# Altium PCB ARDUINO MEGA2560 EXPANSION BOARD_prueba.PcbDoc
Units mm, origin at the board's own origin, x right, y up, seen from the top; angles counter-clockwise.
Board outline 132.72 x 90.17 mm, 2 copper layers (Top Layer, Bottom Layer); 29 components, 58 nets, 654 pads, 0 vias.
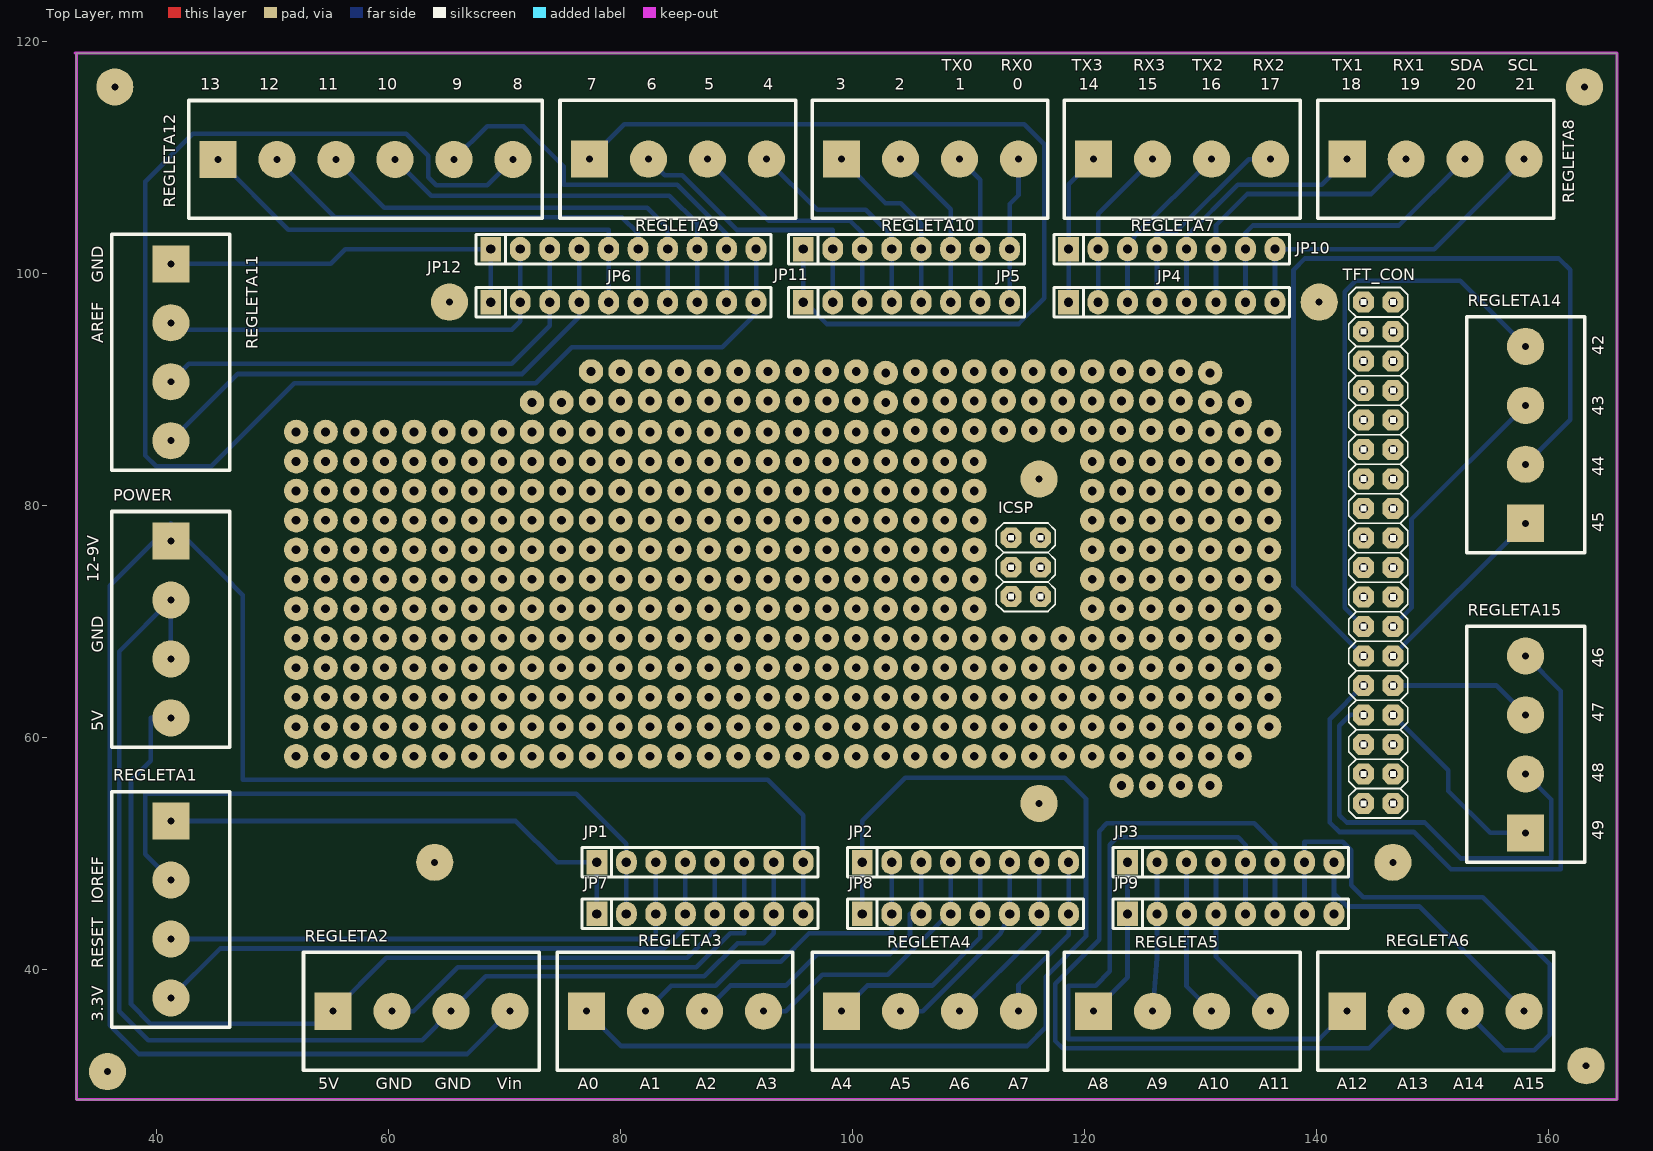
[diagram p0: Top Layer view]
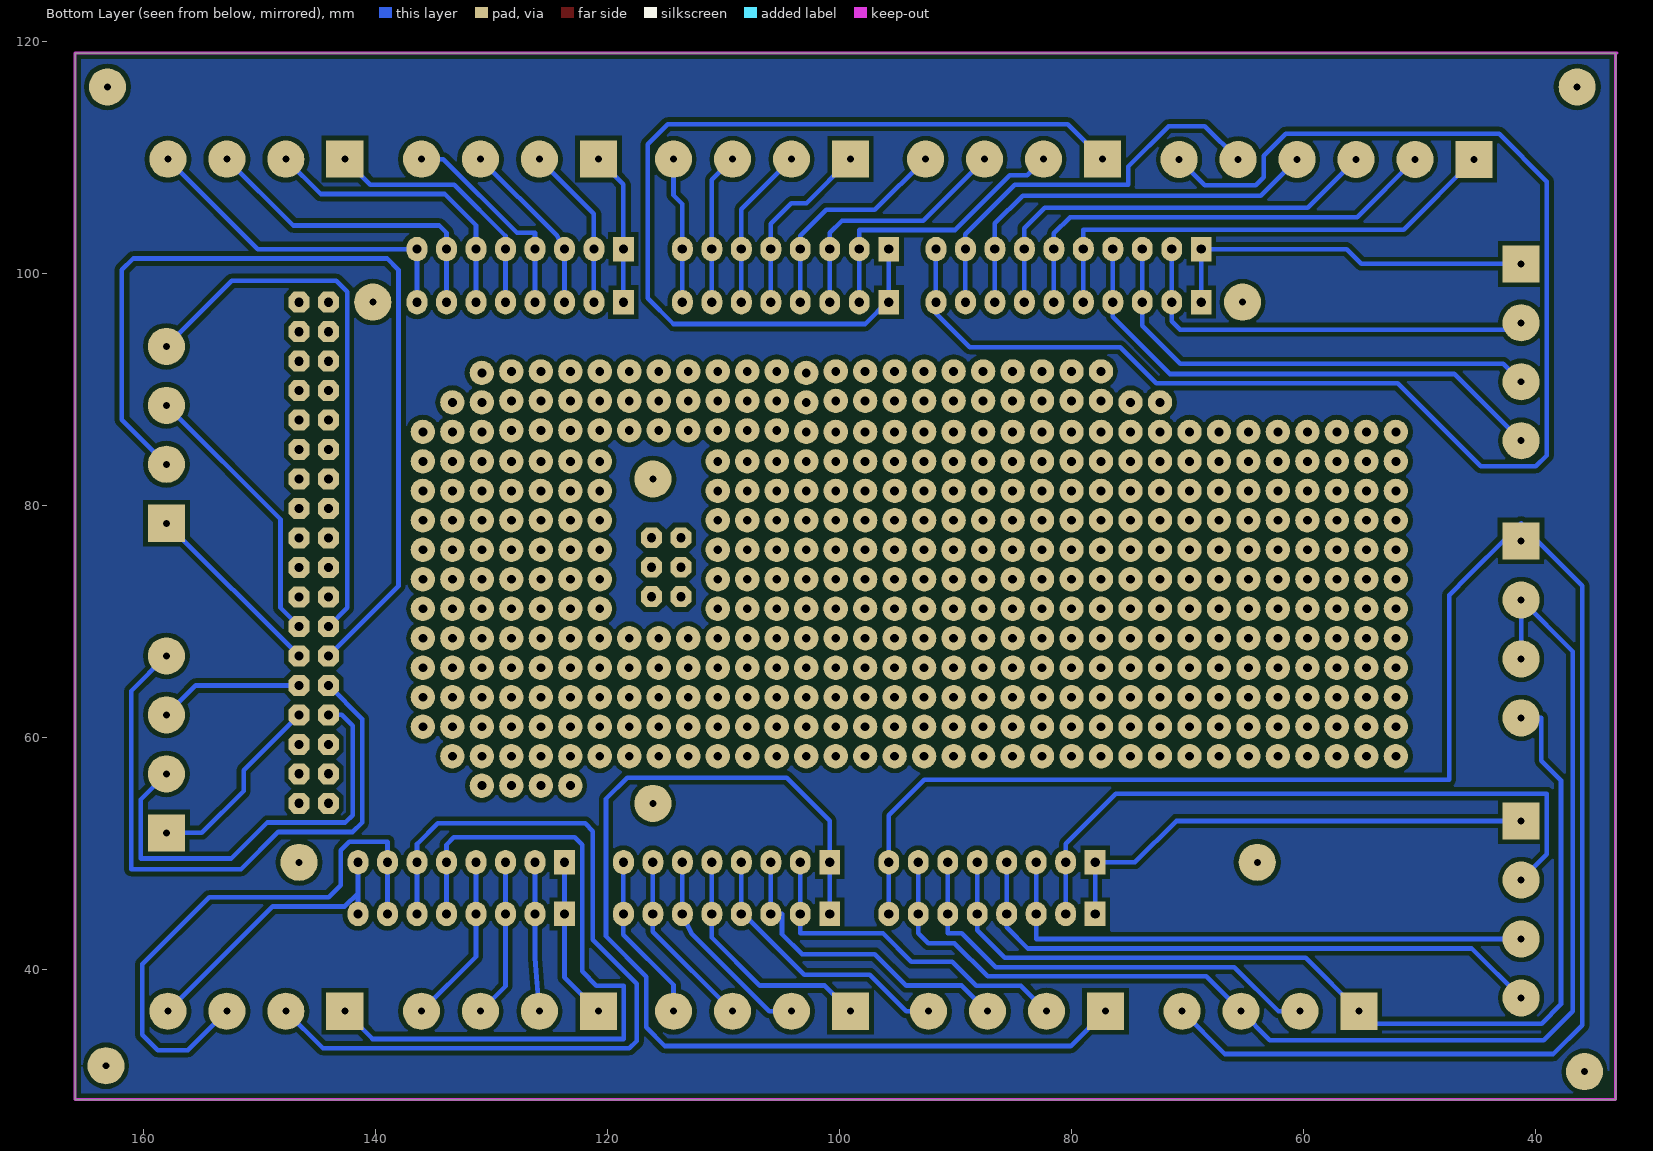
[diagram p1: Bottom Layer view, seen from below]

## Layer stack, top to bottom
Top Solder: solder mask 0.0102, Solder Resist, Dk 3.5
Top Layer: signal copper 0.0356
Dielectric 1: dielectric 0.32, FR-4, Dk 4.8
Bottom Layer: signal copper 0.0356
Bottom Solder: solder mask 0.0102, Solder Resist, Dk 3.5

## Board outline
33.147,118.999 33.147,28.829 162.306,28.829 165.862,28.829 165.862,118.999

## Design rules (kind name [scope] priority, off if disabled: settings)
Clearance [All] p1: gap=0.4
PolygonConnect [All] p1: connectstyle=Relief reliefconductorwidth=0.254 reliefentries=4 polygonreliefangle="90 Angle" airgapwidth=0.254
RoutingLayers [All] p1: top layer_v5=FALSE bottom layer_v5=TRUE
RoutingTopology [All] p1: topology=Daisy_Balanced
RoutingVias [All] p1: holewidth=0.711 width=1.5 viastyle="Through Hole" minholewidth=0.711 minwidth=1.5 maxholewidth=0.711 maxwidth=1.5
SolderMaskExpansion [All] p1: expansion=0.102
Width [All] p1: maxlimit=0.8 minlimit=0.254 preferedwidth=0.4
28 further rules are at their usual default settings.

## Components (designator, comment, footprint, x,y, rotation, side; value= is the part's Value field where it differs from the comment)
ICSP "SIP_2X3" SIP_2X03 113.665,77.216 r270 top
JP1 "SIP_8" SIP_8 77.978,49.276 r0 top
JP2 "SIP_8" SIP_8 100.838,49.276 r0 top
JP3 "SIP_8" SIP_8 123.698,49.276 r0 top
JP4 "SIP_8" SIP_8 118.618,97.536 r0 top
JP5 "SIP_8" SIP_8 95.758,97.536 r0 top
JP6 "SIP_10" SIP_10 68.834,97.536 r0 top
JP7 "SIP_8" SIP_8 77.978,44.831 r0 top
JP8 "SIP_8" SIP_8 100.838,44.831 r0 top
JP9 "SIP_8" SIP_8 123.698,44.831 r0 top
JP10 "SIP_8" SIP_8 118.618,102.108 r0 top
JP11 "SIP_8" SIP_8 95.758,102.108 r0 top
JP12 "SIP_10" SIP_10 68.834,102.108 r0 top
POWER "REGLETA_4" REGLETA_4 41.275,76.962 r270 top
REGLETA1 "REGLETA_4" REGLETA_4 41.275,52.832 r270 top
REGLETA2 "REGLETA_4" REGLETA_4 55.245,36.449 r0 top
REGLETA3 "REGLETA_4" REGLETA_4 77.089,36.449 r0 top
REGLETA4 "REGLETA_4" REGLETA_4 99.06,36.449 r0 top
REGLETA5 "REGLETA_4" REGLETA_4 120.777,36.449 r0 top
REGLETA6 "REGLETA_4" REGLETA_4 142.621,36.449 r0 top
REGLETA7 "REGLETA_4" REGLETA_4 120.777,109.855 r0 top
REGLETA8 "REGLETA_4" REGLETA_4 142.621,109.855 r0 top
REGLETA9 "REGLETA_4" REGLETA_4 77.343,109.855 r0 top
REGLETA10 "REGLETA_4" REGLETA_4 99.06,109.855 r0 top
REGLETA11 "REGLETA_4" REGLETA_4 41.275,100.838 r270 top
REGLETA12 "REGLETA_6" REGLETA_6 45.339,109.855 r0 top
REGLETA14 "REGLETA_4" REGLETA_4 157.988,78.486 r90 top
REGLETA15 "REGLETA_4" REGLETA_4 157.988,51.816 r90 top
TFT_CON "SIP_2X18" SIP_2X18 144.018,97.536 r270 top

## Footprints (in the part's own frame and the unit in brackets; to place one, negate y for a bottom-side part, rotate by r counter-clockwise, add the part's x,y. Pads: shape width x height; smd on the part's side, far side on the other; paste and mask are expansions set on the pad)
REGLETA_4 [mm]
  rect 3.2x3.2 hole 0.6: 1(0,0)
  round 3.2 hole 0.6: 2(5.08,0) 3(10.16,0) 4(15.24,0)
  silkscreen extent -2.54,-5.08 17.78,5.08
REGLETA_6 [mm]
  rect 3.2x3.2 hole 0.6: 1(0,-0.025)
  round 3.2 hole 0.6: 2(5.08,-0.025) 3(10.16,-0.025) 4(15.24,-0.025) 5(20.32,-0.025) 6(25.4,-0.025)
  silkscreen extent -2.54,-5.1 27.94,5.06
SIP_2X03 [mm]
  oct 1.8x1.8 hole 0.8: 1(-0.025,0) 2(-0.025,2.54) 3(2.515,0) 4(2.515,2.54) 5(5.055,0) 6(5.055,2.54)
  silkscreen extent -1.29,-1.27 6.33,3.81
SIP_2X18 [mm]
  oct 1.8x1.8 hole 0.8: 1(0,0) 2(0,2.54) 3(2.54,0) 4(2.54,2.54) 5(5.08,0) 6(5.08,2.54) 7(7.62,0) 8(7.62,2.54) 9(10.16,0) 10(10.16,2.54) 11(12.7,0) 12(12.7,2.54) 13(15.24,0) 14(15.24,2.54) 15(17.78,0) 16(17.78,2.54) 17(20.32,0) 18(20.32,2.54) 19(22.86,0) 20(22.86,2.54) 21(25.4,0) 22(25.4,2.54) 23(27.94,0) 24(27.94,2.54) 25(30.48,0) 26(30.48,2.54) 27(33.02,0) 28(33.02,2.54) 29(35.56,0) 30(35.56,2.54) 31(38.1,0) 32(38.1,2.54) 33(40.64,0) 34(40.64,2.54) 35(43.18,0) 36(43.18,2.54)
  silkscreen extent -1.27,-1.27 44.45,3.81
SIP_8 [mm]
  rect 1.8x2.1 hole 0.8: 1(0,0)
  oval 1.8x2.1 hole 0.8: 2(2.54,0) 3(5.08,0) 4(7.62,0) 5(10.16,0) 6(12.7,0) 7(15.24,0) 8(17.78,0)
  silkscreen extent -1.27,-1.27 19.05,1.27
SIP_10 [mm]
  rect 1.8x2.1 hole 0.8: 1(0,0)
  oval 1.8x2.1 hole 0.8: 2(2.54,0) 3(5.08,0) 4(7.62,0) 5(10.16,0) 6(12.7,0) 7(15.24,0) 8(17.78,0) 9(20.32,0) 10(22.86,0)
  silkscreen extent -1.27,-1.27 24.13,1.27

## Free pads (board coordinates)
  round 3.2 hole 0.6: 1(35.814,31.242) 1(36.449,116.078) 1(64.008,49.276) 1(65.278,97.536) 1(116.078,54.356) 1(116.078,82.296) 1(140.208,97.536) 1(146.558,49.276) 1(163.068,116.078) 1(163.195,31.75)
  round 2.1 hole 0.762: 1(77.47,58.42) 1(77.47,86.36) 1(77.47,89.027) 1(77.47,91.567) 1(80.01,58.42) 1(80.01,63.5) 1(80.01,68.58) 1(80.01,73.66) 1(80.01,78.74) 1(80.01,83.82) 1(80.01,86.36) 1(105.41,58.42) 1(105.41,63.5) 1(105.41,68.58) 1(105.41,89.027) 1(105.41,91.567) 1(123.19,55.88) 1(130.81,55.88) 2(52.07,63.5) 2(52.07,68.58) 2(52.07,73.66) 2(52.07,78.74) 2(54.61,63.5) 2(54.61,68.58) 2(54.61,73.66) 2(54.61,78.74) 2(77.47,83.82) 2(80.01,89.027) 2(80.01,91.567) 2(82.55,58.42) 2(82.55,63.5) 2(82.55,68.58) 2(82.55,73.66) 2(82.55,78.74) 2(82.55,83.82) 2(82.55,86.36) 2(107.95,58.42) 2(107.95,63.5) 2(107.95,68.58) 2(107.95,89.027) 2(107.95,91.567) 2(125.73,55.88) 2(133.35,88.9) 3(52.07,58.42) 3(52.07,83.82) 3(54.61,58.42) 3(54.61,83.82) 3(57.15,58.42) 3(57.15,63.5) 3(57.15,68.58) 3(57.15,73.66) 3(57.15,78.74) 3(57.15,83.82) 3(62.23,86.36) 3(77.47,81.28) 3(82.55,89.027) 3(82.55,91.567) 3(85.09,58.42) 3(85.09,63.5) 3(85.09,68.58) 3(85.09,73.66) 3(85.09,78.74) 3(85.09,83.82) 3(85.09,86.36) 3(110.49,58.42) 3(110.49,63.5) 3(110.49,68.58) 3(110.49,89.027) 3(110.49,91.567) 3(128.27,55.88) 3(133.35,86.36) 3(135.89,86.36) 4(59.69,58.42) 4(59.69,63.5) 4(59.69,68.58) 4(59.69,73.66) 4(59.69,78.74) 4(59.69,83.82) 4(59.69,86.36) 4(77.47,78.74) 4(85.09,89.027) 4(85.09,91.567) 4(87.63,58.42) 4(87.63,63.5) 4(87.63,68.58) 4(87.63,73.66) 4(87.63,78.74) 4(87.63,83.82) 4(87.63,86.36) 4(107.95,83.82) 4(110.49,83.82) 4(113.03,58.42) 4(113.03,63.5) 4(113.03,68.58) 4(113.03,89.027) 4(113.03,91.567) 4(125.73,83.82) 4(128.27,83.82) 4(133.35,83.82) 4(135.89,83.82) 5(57.15,86.36) 5(62.23,58.42) 5(62.23,63.5) 5(62.23,68.58) 5(62.23,73.66) 5(62.23,78.74) 5(62.23,83.82) 5(77.47,76.2) 5(87.63,89.027) 5(87.63,91.567) 5(90.17,58.42) 5(90.17,63.5) 5(90.17,68.58) 5(90.17,73.66) 5(90.17,78.74) 5(90.17,83.82) 5(90.17,86.36) 5(107.95,81.28) 5(110.49,81.28) 5(115.57,58.42) 5(115.57,63.5) 5(115.57,68.58) 5(115.57,89.027) 5(115.57,91.567) 5(125.73,81.28) 5(128.27,81.28) 5(133.35,81.28) 5(135.89,81.28) 6(52.07,86.36) 6(54.61,86.36) 6(64.77,58.42) 6(64.77,63.5) 6(64.77,68.58) 6(64.77,73.66) 6(64.77,78.74) 6(64.77,83.82) 6(64.77,86.36) 6(77.47,73.66) 6(90.17,89.027) 6(90.17,91.567) 6(92.71,58.42) 6(92.71,63.5) 6(92.71,68.58) 6(92.71,73.66) 6(92.71,78.74) 6(92.71,83.82) 6(92.71,86.36) 6(107.95,78.74) 6(110.49,78.74) 6(118.11,58.42) 6(118.11,63.5) 6(118.11,68.58) 6(118.11,89.027) 6(118.11,91.567) 6(125.73,78.74) 6(128.27,78.74) 6(133.35,78.74) 6(135.89,78.74) 7(67.31,58.42) 7(67.31,63.5) 7(67.31,68.58) 7(67.31,73.66) 7(67.31,78.74) 7(67.31,83.82) 7(67.31,86.36) 7(77.47,71.12) 7(92.71,89.027) 7(92.71,91.567) 7(95.25,58.42) 7(95.25,63.5) 7(95.25,68.58) 7(95.25,73.66) 7(95.25,78.74) 7(95.25,83.82) 7(95.25,86.36) 7(107.95,76.2) 7(110.49,76.2) 7(120.65,58.42) 7(120.65,63.5) 7(120.65,68.58) 7(120.65,89.027) 7(120.65,91.567) 7(125.73,76.2) 7(128.27,76.2) 7(133.35,76.2) 7(135.89,76.2) 8(69.85,58.42) 8(69.85,63.5) 8(69.85,68.58) 8(69.85,73.66) 8(69.85,78.74) 8(69.85,83.82) 8(69.85,86.36) 8(77.47,68.58) 8(95.25,89.027) 8(95.25,91.567) 8(97.79,58.42) 8(97.79,63.5) 8(97.79,68.58) 8(97.79,73.66) 8(97.79,78.74) 8(97.79,83.82) 8(97.79,86.36) 8(107.95,73.66) 8(110.49,73.66) 8(123.19,58.42) 8(123.19,63.5) 8(123.19,68.58) 8(123.19,89.027) 8(123.19,91.567) 8(125.73,73.66) 8(128.27,73.66) 8(130.81,58.42) 8(130.81,63.5) 8(133.35,73.66) 8(135.89,73.66) 9(72.39,58.42) 9(72.39,63.5) 9(72.39,68.58) 9(72.39,73.66) 9(72.39,78.74) 9(72.39,83.82) 9(72.39,86.36) 9(72.39,88.9) 9(77.47,66.04) 9(97.79,89.027) 9(97.79,91.567) 9(100.33,58.42) 9(100.33,63.5) 9(100.33,68.58) 9(100.33,73.66) 9(100.33,78.74) 9(100.33,83.82) 9(100.33,86.36) 9(107.95,71.12) 9(110.49,71.12) 9(125.73,58.42) 9(125.73,63.5) 9(125.73,68.58) 9(125.73,71.12) 9(125.73,89.027) 9(125.73,91.567) 9(128.27,71.12) 9(133.35,58.42) 9(133.35,63.5) 9(133.35,71.12) 9(135.89,71.12) 10(74.93,58.42) 10(74.93,63.5) 10(74.93,68.58) 10(74.93,73.66) 10(74.93,78.74) 10(74.93,83.82) 10(74.93,86.36) 10(74.93,88.9) 10(77.47,63.5) 10(100.33,89.027) 10(100.33,91.567) 10(102.87,58.42) 10(102.87,63.5) 10(102.87,68.58) 10(102.87,73.66) 10(102.87,78.74) 10(102.87,83.82) 10(102.87,86.36) 10(128.27,58.42) 10(128.27,63.5) 10(128.27,68.58) 10(128.27,89.027) 10(128.27,91.567) 10(133.35,68.58) 10(135.89,63.5) 10(135.89,68.58) 11(74.93,60.96) 11(74.93,66.04) 11(74.93,71.12) 11(74.93,76.2) 11(74.93,81.28) 11(102.87,60.96) 11(102.87,66.04) 11(102.87,71.12) 11(102.87,76.2) 11(102.87,81.28) 11(128.27,60.96) 11(128.27,66.04) 11(128.27,86.487) 11(130.81,68.58) 11(135.89,60.96) 11(135.89,66.04) 12(72.39,60.96) 12(72.39,66.04) 12(72.39,71.12) 12(72.39,76.2) 12(72.39,81.28) 12(100.33,60.96) 12(100.33,66.04) 12(100.33,71.12) 12(100.33,76.2) 12(100.33,81.28) 12(105.41,71.12) 12(120.65,71.12) 12(123.19,71.12) 12(125.73,60.96) 12(125.73,66.04) 12(125.73,86.487) 12(130.81,71.12) 12(133.35,60.96) 12(133.35,66.04) 13(69.85,60.96) 13(69.85,66.04) 13(69.85,71.12) 13(69.85,76.2) 13(69.85,81.28) 13(97.79,60.96) 13(97.79,66.04) 13(97.79,71.12) 13(97.79,76.2) 13(97.79,81.28) 13(105.41,73.66) 13(120.65,73.66) 13(123.19,60.96) 13(123.19,66.04) 13(123.19,73.66) 13(123.19,86.487) 13(130.81,60.96) 13(130.81,66.04) 13(130.81,73.66) 14(67.31,60.96) 14(67.31,66.04) 14(67.31,71.12) 14(67.31,76.2) 14(67.31,81.28) 14(95.25,60.96) 14(95.25,66.04) 14(95.25,71.12) 14(95.25,76.2) 14(95.25,81.28) 14(105.41,76.2) 14(120.65,60.96) 14(120.65,66.04) 14(120.65,76.2) 14(120.65,86.487) 14(123.19,76.2) 14(130.81,76.2) 15(64.77,60.96) 15(64.77,66.04) 15(64.77,71.12) 15(64.77,76.2) 15(64.77,81.28) 15(92.71,60.96) 15(92.71,66.04) 15(92.71,71.12) 15(92.71,76.2) 15(92.71,81.28) 15(105.41,78.74) 15(118.11,60.96) 15(118.11,66.04) 15(118.11,86.487) 15(120.65,78.74) 15(123.19,78.74) 15(130.81,78.74) 16(62.23,60.96) 16(62.23,66.04) 16(62.23,71.12) 16(62.23,76.2) 16(62.23,81.28) 16(90.17,60.96) 16(90.17,66.04) 16(90.17,71.12) 16(90.17,76.2) 16(90.17,81.28) 16(105.41,81.28) 16(115.57,60.96) 16(115.57,66.04) 16(115.57,86.487) 16(120.65,81.28) 16(123.19,81.28) 16(130.81,81.28) 17(59.69,60.96) 17(59.69,66.04) 17(59.69,71.12) 17(59.69,76.2) 17(59.69,81.28) 17(87.63,60.96) 17(87.63,66.04) 17(87.63,71.12) 17(87.63,76.2) 17(87.63,81.28) 17(105.41,83.82) 17(113.03,60.96) 17(113.03,66.04) 17(113.03,86.487) 17(120.65,83.82) 17(123.19,83.82) 17(130.81,83.82) 18(57.15,60.96) 18(57.15,66.04) 18(57.15,71.12) 18(57.15,76.2) 18(57.15,81.28) 18(85.09,60.96) 18(85.09,66.04) 18(85.09,71.12) 18(85.09,76.2) 18(85.09,81.28) 18(110.49,60.96) 18(110.49,66.04) 18(110.49,86.487) 18(130.81,86.36) 19(52.07,60.96) 19(52.07,66.04) 19(52.07,71.12) 19(52.07,76.2) 19(52.07,81.28) 19(54.61,60.96) 19(54.61,66.04) 19(54.61,71.12) 19(54.61,76.2) 19(54.61,81.28) 19(82.55,60.96) 19(82.55,66.04) 19(82.55,71.12) 19(82.55,76.2) 19(82.55,81.28) 19(102.87,88.9) 19(107.95,60.96) 19(107.95,66.04) 19(107.95,86.487) 19(130.81,88.9) 20(77.47,60.96) 20(80.01,60.96) 20(80.01,66.04) 20(80.01,71.12) 20(80.01,76.2) 20(80.01,81.28) 20(102.87,91.44) 20(105.41,60.96) 20(105.41,66.04) 20(105.41,86.487) 20(130.81,91.44)

## Nets (pads, with @x,y where several pads share a name; then routed paths per layer and width w, separated by ;. In a path a pad name is that pad's centre, name@x,y a point inside that pad or via, vN(x,y) a via of type N, cw(c..) or ccw(c..) an arc to the next point about the centre after c; other vN are vias at no path point)
NetJP1_1: JP1.1 JP7.1 REGLETA1.1 | length 42.6
  Bottom Layer w0.4: REGLETA1.1 70.993,52.832 74.549,49.276 JP1.1 JP7.1
NetJP1_2: JP1.2 JP7.2 REGLETA1.2 | length 57.6
  Bottom Layer w0.4: REGLETA1.2 39.065,49.962 39.065,55.194 76.2,55.194 80.518,50.876 JP1.2 JP7.2
NetJP1_3: JP1.3 JP7.3 REGLETA1.3 | length 48.4
  Bottom Layer w0.4: REGLETA1.3 83.058,42.672 JP7.3 JP1.3
NetJP1_4: JP1.4 JP7.4 REGLETA1.4 | length 52.4
  Bottom Layer w0.4: REGLETA1.4 45.532,41.849 83.766,41.849 85.598,43.681 JP7.4 JP1.4
NetJP1_5: JP1.5 JP7.5 POWER.4 REGLETA2.1 | length 87.3
  Bottom Layer w0.4: POWER.4 39.548,61.722 39.548,58.039 37.846,56.337 37.846,37.035 39.499,35.382 54.178,35.382 REGLETA2.1 59.845,41.049 85.754,41.049 88.138,43.433 JP7.5 JP1.5
NetJP1_6: JP1.6 JP7.6 REGLETA2.2 | length 39.2
  Bottom Layer w0.4: REGLETA2.2 62.179,36.449 65.979,40.249 86.554,40.249 89.485,43.18 90.678,43.18 JP7.6 JP1.6
NetJP1_7: JP1.7 JP7.7 POWER.2 POWER.3 REGLETA2.3 | length 109.7
  Bottom Layer w0.4: POWER.3 POWER.2 36.83,67.437 36.83,36.452 39.322,33.96 62.916,33.96 REGLETA2.3 68.405,39.449 87.232,39.449 90.099,42.316 92.354,42.316 93.218,43.18 JP7.7 JP1.7
NetJP1_8: JP1.8 JP7.8 POWER.1 REGLETA2.4 | length 167.5
  Bottom Layer w0.4: POWER.1@40.945,76.632 40.246,77.33 36.017,73.101 36.017,35.255 38.506,32.766 66.802,32.766 REGLETA2.4 ; JP7.8 JP1.8 95.758,53.34 92.71,56.388 47.473,56.388 47.473,72.301 45.783,73.99 POWER.1@42.558,77.216 ; POWER.1@42.558,77.216 41.275,78.499 POWER.1 41.529,77.216 POWER.1@42.558,77.216
NetJP2_1: JP2.1 JP8.1 REGLETA3.1 | length 92.2
  Bottom Layer w0.4: REGLETA3.1 80.089,33.449 115.034,33.449 116.656,35.071 116.656,39.43 120.118,42.892 120.118,54.736 118.288,56.566 104.546,56.566 100.838,52.857 JP2.1 100.838,47.041 JP8.1
NetJP2_2: JP2.2 JP8.2 REGLETA3.2 | length 30.1
  Bottom Layer w0.4: REGLETA3.2 84.369,38.649 88.23,38.649 90.302,40.721 93.82,40.721 96.254,43.155 103.378,43.155 JP8.2 JP2.2
NetJP2_3: JP2.3 JP8.3 REGLETA3.3 | length 27.6
  Bottom Layer w0.4: REGLETA3.3 89.459,38.659 94.259,38.659 96.952,41.351 103.226,41.351 104.953,43.078 104.953,44.831 JP8.3 JP2.3
NetJP2_4: JP2.4 JP8.4 REGLETA3.4 | length 24
  Bottom Layer w0.4: REGLETA3.4 94.234,36.449 97.387,39.602 103.051,39.602 108.28,44.831 JP8.4 JP2.4
NetJP2_5: JP2.5 JP8.5 REGLETA4.1 | length 21
  Bottom Layer w0.4: REGLETA4.1 101.27,38.659 106.858,38.659 110.998,42.799 JP8.5 JP2.5
NetJP2_6: JP2.6 JP8.6 REGLETA4.2 | length 17.7
  Bottom Layer w0.4: REGLETA4.2 106.045,36.449 112.776,43.18 JP8.6 JP2.6
NetJP2_7: JP2.7 JP8.7 REGLETA4.3 | length 15.7
  Bottom Layer w0.4: REGLETA4.3 116.078,43.307 JP8.7 JP2.7
NetJP2_8: JP2.8 JP8.8 REGLETA4.4 | length 14.6
  Bottom Layer w0.4: REGLETA4.4 114.3,38.735 118.618,43.053 JP8.8 JP2.8
NetJP3_1: JP3.1 JP9.1 REGLETA5.1 | length 14
  Bottom Layer w0.4: REGLETA5.1 123.698,39.37 JP9.1 JP3.1
NetJP3_2: JP3.2 JP9.2 REGLETA5.2 | length 12.8
  Bottom Layer w0.4: REGLETA5.2 126.238,41.021 JP9.2 JP3.2
NetJP3_3: JP3.3 JP9.3 REGLETA5.3 | length 13.7
  Bottom Layer w0.4: JP3.3 128.778,47.041 JP9.3 128.778,38.608 REGLETA5.3
NetJP3_4: JP3.4 JP9.4 REGLETA5.4 | length 14.8
  Bottom Layer w0.4: JP3.4 131.318,47.041 JP9.4 131.318,41.148 REGLETA5.4
NetJP3_5: JP3.5 JP9.5 REGLETA6.1 | length 62.8
  Bottom Layer w0.4: JP9.5 JP3.5 133.858,50.8 133.223,51.435 122.809,51.435 122.174,50.8 122.174,39.878 120.946,38.649 118.577,38.649 118.577,34.061 140.233,34.061 REGLETA6.1
NetJP3_6: JP3.6 JP9.6 REGLETA6.2 | length 73.6
  Bottom Layer w0.4: JP9.6 JP3.6 136.398,50.851 134.62,52.629 121.92,52.629 121.26,51.968 121.26,42.599 117.475,38.814 117.475,33.884 118.11,33.249 144.501,33.249 REGLETA6.2
NetJP3_7: JP3.7 JP9.7 REGLETA6.3 | length 48.8
  Bottom Layer w0.4: JP9.7 JP3.7 138.938,51.054 142.24,51.054 142.978,50.316 142.978,47.293 143.996,46.276 154.308,46.276 160.071,40.513 160.071,34.417 158.75,33.096 156.134,33.096 REGLETA6.3
NetJP3_8: JP3.8 JP9.8 REGLETA6.4 | length 25
  Bottom Layer w0.4: JP9.8 141.478,46.622 ; JP3.8 141.478,47.041 141.478,46.622 ; REGLETA6.4 148.834,45.476 142.624,45.476 141.478,46.622
NetJP4_1: JP4.1 JP10.1 REGLETA7.1 | length 13.2
  Bottom Layer w0.4: JP4.1 JP10.1 118.618,107.696 REGLETA7.1
NetJP4_2: JP4.2 JP10.2 REGLETA7.2 | length 14.3
  Bottom Layer w0.4: JP4.2 JP10.2 121.158,105.156 REGLETA7.2
NetJP4_3: JP4.3 JP10.3 REGLETA7.3 | length 15.2
  Bottom Layer w0.4: JP4.3 JP10.3 124.333,103.251 REGLETA7.3
NetJP4_4: JP4.4 JP10.4 REGLETA7.4 | length 18.4
  Bottom Layer w0.4: JP4.4 JP10.4 126.238,103.505 127.787,103.505 134.137,109.855 REGLETA7.4
NetJP4_5: JP4.5 JP10.5 REGLETA8.1 | length 22.3
  Bottom Layer w0.4: JP4.5 JP10.5 128.778,103.235 133.198,107.655 140.421,107.655 REGLETA8.1
NetJP4_6: JP4.6 JP10.6 REGLETA8.2 | length 25.4
  Bottom Layer w0.4: JP4.6 JP10.6 131.318,104.166 134.007,106.855 144.701,106.855 REGLETA8.2
NetJP4_7: JP4.7 JP10.7 REGLETA8.3 | length 27.5
  Bottom Layer w0.4: JP4.7 JP10.7 133.858,103.505 134.493,104.14 147.066,104.14 REGLETA8.3
NetJP4_8: JP4.8 JP10.8 REGLETA8.4 | length 29.2
  Bottom Layer w0.4: JP4.8 JP10.8 150.114,102.108 REGLETA8.4
NetJP5_1: JP5.1 JP11.1 REGLETA9.1 | length 81.5
  Bottom Layer w0.4: REGLETA9.1 80.343,112.855 114.78,112.855 116.51,111.125 116.51,97.866 114.3,95.656 97.79,95.656 JP5.1@95.758,97.688 ; JP5.1 JP5.1@95.758,97.688 ; JP11.1 95.758,99.822 JP5.1@95.758,97.688
NetJP5_2: JP5.2 JP11.2 REGLETA9.2 | length 24.6
  Bottom Layer w0.4: REGLETA9.2 83.82,108.458 85.319,108.458 90.019,103.758 98.298,103.758 JP11.2 JP5.2
NetJP5_3: JP5.3 JP11.3 REGLETA9.3 | length 21.9
  Bottom Layer w0.4: REGLETA9.3 92.8,104.558 99.785,104.558 100.838,103.505 JP11.3 JP5.3
NetJP5_4: JP5.4 JP11.4 REGLETA9.4 | length 19.2
  Bottom Layer w0.4: REGLETA9.4 96.955,105.483 101.149,105.483 103.378,103.254 JP11.4 JP5.4
NetJP5_5: JP5.5 JP11.5 REGLETA10.1 | length 15.9
  Bottom Layer w0.4: REGLETA10.1 102.845,106.07 104.14,106.07 105.918,104.292 JP11.5 JP5.5
NetJP5_6: JP5.6 JP11.6 REGLETA10.2 | length 14.1
  Bottom Layer w0.4: REGLETA10.2 108.458,105.537 JP11.6 JP5.6
NetJP5_7: JP5.7 JP11.7 REGLETA10.3 | length 13.1
  Bottom Layer w0.4: REGLETA10.3 110.998,108.077 JP11.7 JP5.7
NetJP5_8: JP5.8 JP11.8 REGLETA10.4 | length 12.6
  Bottom Layer w0.4: JP5.8 JP11.8 113.538,105.994 114.3,106.756 REGLETA10.4
NetJP6_1: JP6.1 JP12.1 REGLETA11.1 | length 32.7
  Bottom Layer w0.4: REGLETA11.1 55.042,100.838 56.312,102.108 JP12.1 JP6.1
NetJP6_2: JP6.2 JP12.2 REGLETA11.2 | length 37.2
  Bottom Layer w0.4: REGLETA11.2 41.275,95.174 70.663,95.174 71.374,95.885 JP6.2 JP12.2
NetJP6_3: JP6.3 JP12.3 REGLETA11.3 | length 41.2
  Bottom Layer w0.4: REGLETA11.3 42.827,92.23 70.64,92.23 73.914,95.504 JP6.3 JP12.3
NetJP6_4: JP6.4 JP12.4 REGLETA11.4 | length 45.4
  Bottom Layer w0.4: REGLETA11.4 47.028,91.351 71.539,91.351 76.454,96.266 JP6.4 JP12.4
NetJP6_5: JP6.5 JP12.5 REGLETA12.1 | length 42.4
  Bottom Layer w0.4: REGLETA12.1 51.387,103.782 78.994,103.782 JP12.5 JP6.5
NetJP6_6: JP6.6 JP12.6 REGLETA12.2 | length 39.7
  Bottom Layer w0.4: REGLETA12.2 55.398,104.851 80.137,104.851 81.534,103.454 JP12.6 JP6.6
NetJP6_7: JP6.7 JP12.7 REGLETA12.3 | length 37.4
  Bottom Layer w0.4: REGLETA12.3 59.665,105.664 82.319,105.664 84.074,103.909 JP12.7 JP6.7
NetJP6_8: JP6.8 JP12.8 REGLETA12.4 | length 35.1
  Bottom Layer w0.4: REGLETA12.4 63.704,106.705 84.226,106.705 86.614,104.318 JP12.8 JP6.8
NetJP6_9: JP6.9 JP12.9 REGLETA12.5 | length 35.3
  Bottom Layer w0.4: REGLETA12.5 68.529,112.7 71.653,112.7 75.133,109.22 75.133,107.645 84.887,107.645 89.154,103.378 JP12.9 JP6.9
NetJP6_10: JP6.10 JP12.10 REGLETA12.6 | length 124.8
  Bottom Layer w0.4: REGLETA12.6 68.529,107.62 64.135,107.62 63.449,108.306 63.449,110.16 61.57,112.039 43.18,112.039 39.065,107.925 39.065,84.328 40.005,83.388 44.755,83.388 51.917,90.55 72.719,90.55 75.819,93.65 88.773,93.65 91.694,96.571 JP6.10 91.694,99.822 JP12.10
NetREGLETA14_1: REGLETA14.1 TFT_CON.26 | length 16.2
  Bottom Layer w0.4: TFT_CON.26 REGLETA14.1
NetREGLETA14_2: REGLETA14.2 TFT_CON.25 | length 78.7
  Bottom Layer w0.4: TFT_CON.25 137.998,73.076 137.998,100.33 138.963,101.295 160.858,101.295 161.823,100.33 161.823,87.401 REGLETA14.2
NetREGLETA14_3: REGLETA14.3 TFT_CON.24 | length 23.8
  Bottom Layer w0.4: TFT_CON.24 148.158,71.196 148.158,78.816 REGLETA14.3
NetREGLETA14_4: REGLETA14.4 TFT_CON.23 | length 47.8
  Bottom Layer w0.4: TFT_CON.23 142.418,71.196 142.418,98.425 143.361,99.368 152.346,99.368 REGLETA14.4
NetREGLETA15_1: REGLETA15.1 TFT_CON.30 | length 16.7
  Bottom Layer w0.4: TFT_CON.30 151.333,57.201 151.333,55.423 154.94,51.816 REGLETA15.1
NetREGLETA15_2: REGLETA15.2 TFT_CON.29 | length 38.2
  Bottom Layer w0.4: TFT_CON.29 142.875,61.976 141.935,61.036 141.935,53.34 142.57,52.705 149.301,52.705 152.4,49.606 160.198,49.606 160.198,54.686 REGLETA15.2
NetREGLETA15_3: REGLETA15.3 TFT_CON.28 | length 12.5
  Bottom Layer w0.4: TFT_CON.28 155.448,64.516 REGLETA15.3
NetREGLETA15_4: REGLETA15.4 TFT_CON.27 | length 54.2
  Bottom Layer w0.4: TFT_CON.27 141.122,61.62 141.122,52.705 141.935,51.892 148.361,51.892 151.562,48.692 161.011,48.692 161.011,64.033 REGLETA15.4
pads on no net: ICSP.1 ICSP.2 ICSP.3 ICSP.4 ICSP.5 ICSP.6 TFT_CON.1 TFT_CON.2 TFT_CON.3 TFT_CON.4 TFT_CON.5 TFT_CON.6 TFT_CON.7 TFT_CON.8 TFT_CON.9 TFT_CON.10 TFT_CON.11 TFT_CON.12 TFT_CON.13 TFT_CON.14 TFT_CON.15 TFT_CON.16 TFT_CON.17 TFT_CON.18 TFT_CON.19 TFT_CON.20 TFT_CON.21 TFT_CON.22 TFT_CON.31 TFT_CON.32 TFT_CON.33 TFT_CON.34 TFT_CON.35 TFT_CON.36

## Polygon pours and split planes (outlines as drawn)
no net on Bottom Layer "Bottom Layer-No Net" (solid, pour order 2): 33.02,118.999 165.735,118.999 165.735,29.083 165.862,28.956 33.02,28.956 33.02,118.872 33.147,118.999

## Keep-outs
Keep-Out Layer:
  lines w0.254: 33.02,118.999 165.862,118.999 165.862,28.829 33.147,28.829 33.147,118.999

## Silkscreen, mask and mechanical layers (free items; w line width, h text height)
Top Overlay:
  text "TX0" at 107.696,117.475 h1.02
  text "RX0" at 112.776,117.475 h1.02
  text "TX3" at 118.872,117.475 h1.02
  text "RX3" at 124.206,117.475 h1.02
  text "TX2" at 129.286,117.475 h1.02
  text "RX2" at 134.493,117.475 h1.02
  text "TX1" at 141.351,117.475 h1.02
  text "RX1" at 146.558,117.475 h1.02
  text "SDA" at 151.511,117.475 h1.02
  text "SCL" at 156.464,117.475 h1.02
  text "13" at 43.815,115.824 h1.02
  text "12" at 48.895,115.824 h1.02
  text "11" at 53.975,115.824 h1.02
  text "10" at 59.055,115.824 h1.02
  text "9" at 65.532,115.824 h1.02
  text "8" at 70.739,115.824 h1.02
  text "7" at 77.089,115.824 h1.02
  text "6" at 82.296,115.824 h1.02
  text "5" at 87.249,115.824 h1.02
  text "4" at 92.329,115.824 h1.02
  text "3" at 98.552,115.824 h1.02
  text "2" at 103.632,115.824 h1.02
  text "1" at 108.839,115.824 h1.02
  text "0" at 113.792,115.824 h1.02
  text "14" at 119.507,115.824 h1.02
  text "15" at 124.587,115.824 h1.02
  text "16" at 130.048,115.824 h1.02
  text "17" at 135.128,115.824 h1.02
  text "18" at 142.113,115.824 h1.02
  text "19" at 147.193,115.824 h1.02
  text "20" at 152.019,115.824 h1.02
  text "21" at 157.099,115.824 h1.02
  text "GND" at 35.433,99.187 h1.02 r90
  text "AREF" at 35.433,93.98 h1.02 r90
  text "42" at 164.719,92.964 h1.02 r90
  text "43" at 164.719,87.757 h1.02 r90
  text "44" at 164.719,82.55 h1.02 r90
  text "45" at 164.719,77.724 h1.02 r90
  text "12-9V" at 35.052,73.406 h1.02 r90
  text "GND" at 35.433,67.31 h1.02 r90
  text "46" at 164.719,66.04 h1.02 r90
  text "47" at 164.719,61.341 h1.02 r90
  text "5V" at 35.433,60.579 h1.02 r90
  text "48" at 164.719,56.134 h1.02 r90
  text "49" at 164.719,51.181 h1.02 r90
  text "IOREF" at 35.433,45.72 h1.02 r90
  text "RESET" at 35.433,40.132 h1.02 r90
  text "3.3V" at 35.433,35.56 h1.02 r90
  text "5V" at 53.975,29.718 h1.02
  text "GND" at 58.928,29.718 h1.02
  text "GND" at 64.008,29.718 h1.02
  text "Vin" at 69.342,29.718 h1.02
  text "A0" at 76.327,29.718 h1.02
  text "A1" at 81.661,29.718 h1.02
  text "A2" at 86.487,29.718 h1.02
  text "A3" at 91.694,29.718 h1.02
  text "A4" at 98.171,29.718 h1.02
  text "A5" at 103.251,29.718 h1.02
  text "A6" at 108.331,29.718 h1.02
  text "A7" at 113.411,29.718 h1.02
  text "A8" at 120.269,29.718 h1.02
  text "A9" at 125.349,29.718 h1.02
  text "A10" at 129.794,29.718 h1.02
  text "A11" at 135.001,29.718 h1.02
  text "A12" at 141.732,29.718 h1.02
  text "A13" at 146.939,29.718 h1.02
  text "A14" at 151.765,29.718 h1.02
  text "A15" at 156.972,29.718 h1.02